# Altium PCB regulation.PcbDoc
Units mm, origin at the board's own origin, x right, y up, seen from the top; angles counter-clockwise.
Board outline 71.88 x 54.23 mm, 2 copper layers (Top Layer, Bottom Layer); 11 components, 9 nets, 31 pads, 17 vias.
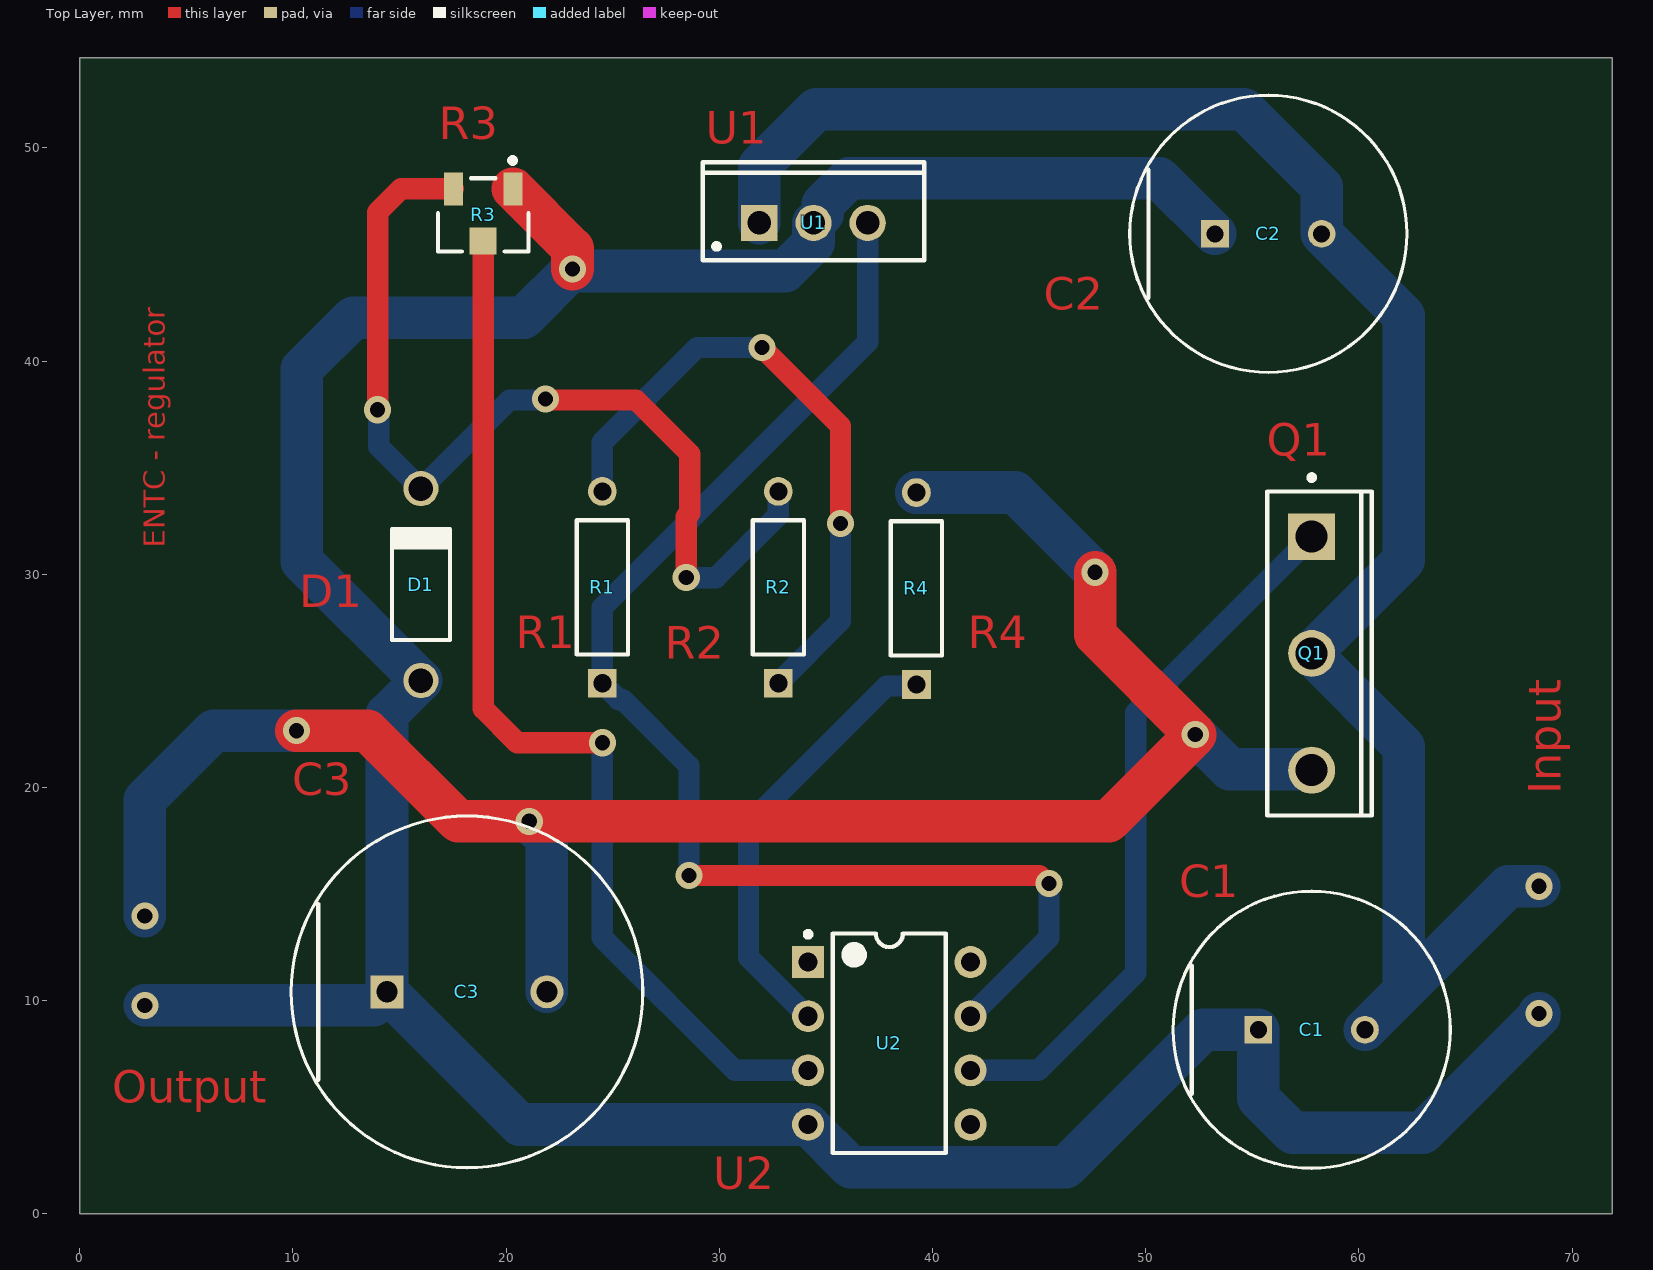
[diagram p0: Top Layer view]
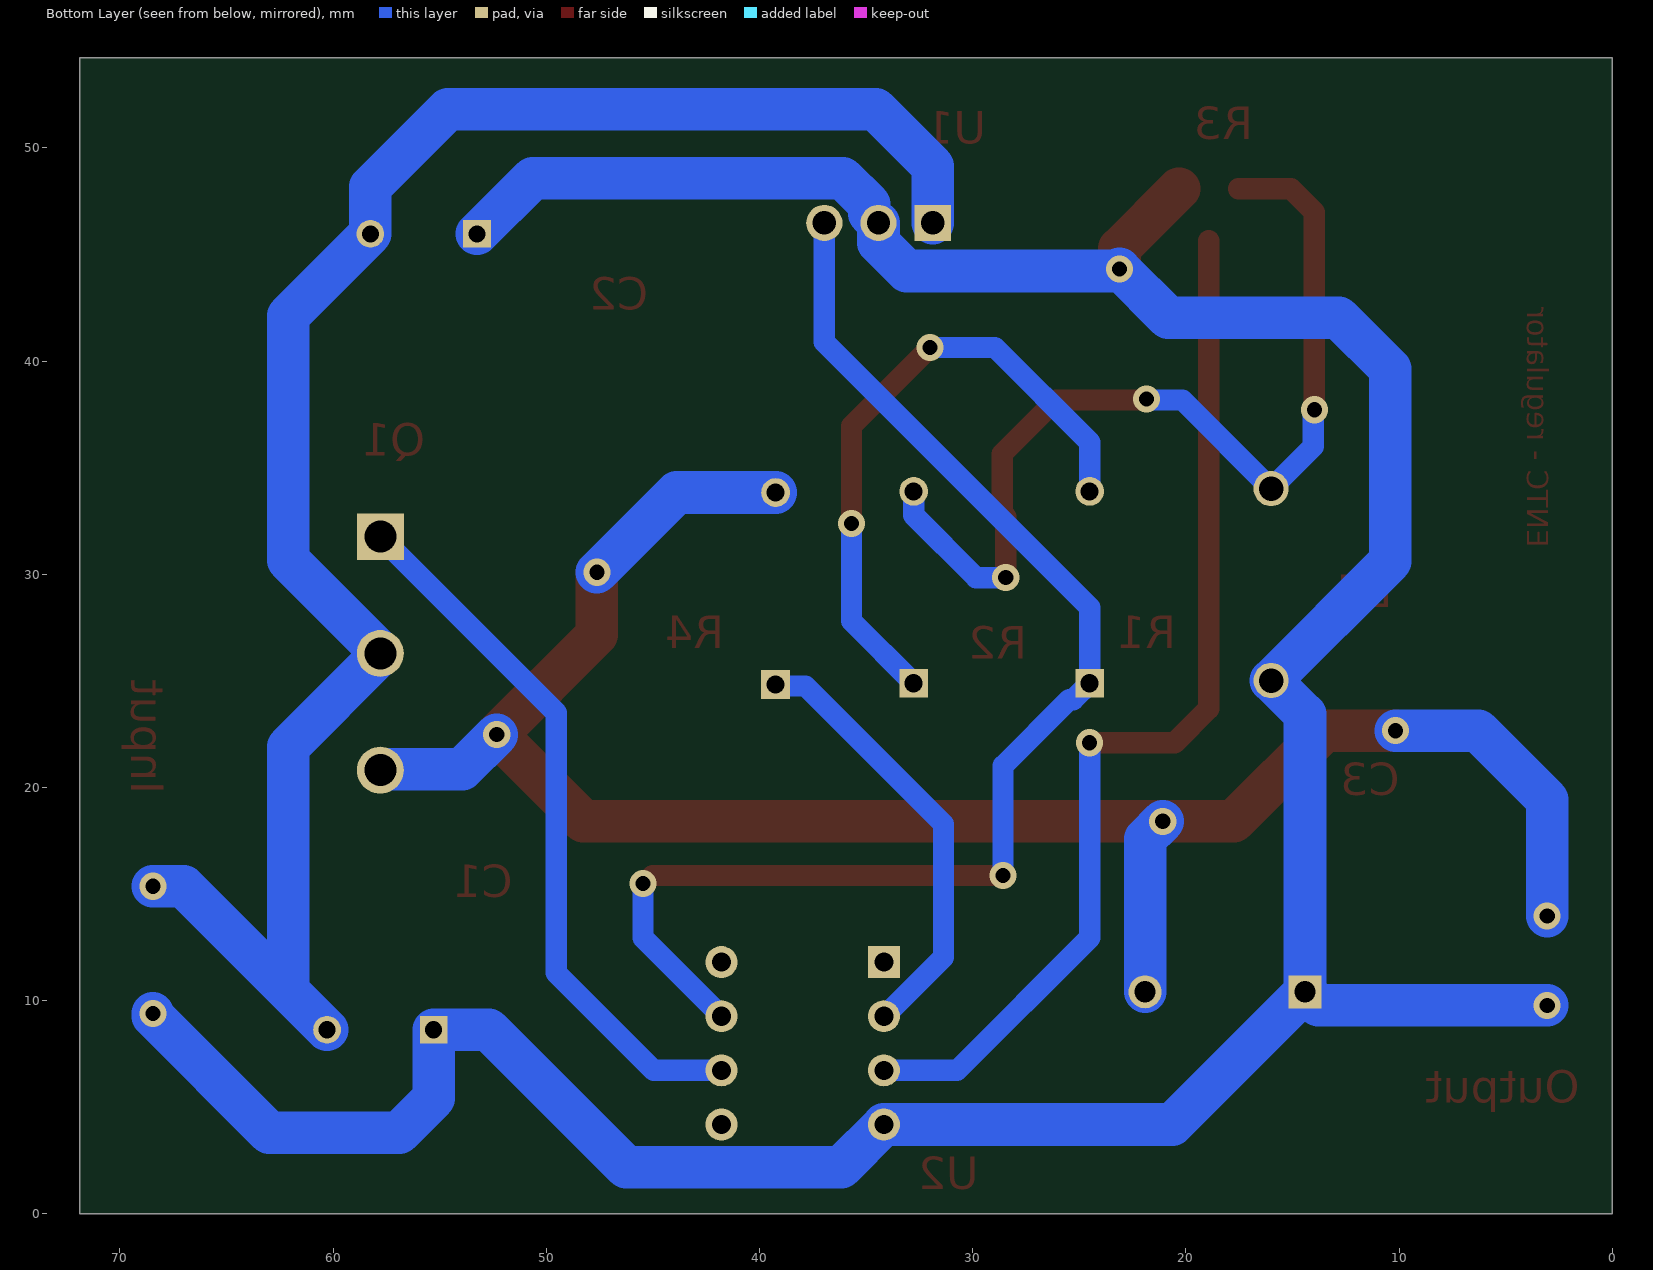
[diagram p1: Bottom Layer view, seen from below]

## Layer stack, top to bottom
Top Solder: solder mask 0.0102, Solder Resist, Dk 3.5
Top Layer: signal copper 0.0356
Dielectric 1: dielectric 0.32, FR-4, Dk 4.8
Bottom Layer: signal copper 0.0356
Bottom Solder: solder mask 0.0102, Solder Resist, Dk 3.5

## Board outline
0,0 71.882,0 71.882,54.229 0,54.229

## Design rules (kind name [scope] priority, off if disabled: settings)
Clearance [All] p1: gap=0.254 ignorepadtopadclearanceinfootprint=FALSE except(0: Arc-Hole Track-Hole SMDPad-Hole THPad-Hole Via-Hole Fill-Hole Poly-Hole Region-Hole Text-Hole)
PolygonConnect [All] p1: connectstyle=Relief reliefconductorwidth=0.254 reliefentries=4 polygonreliefangle="90 Angle" airgapwidth=0.254
RoutingVias [All] p1: holewidth=0.711 width=1.27 viastyle="Through Hole" minholewidth=0.711 minwidth=1.27 maxholewidth=0.711 maxwidth=1.27
SolderMaskExpansion [All] p1: expansion=0.102 istentingtop=FALSE
Width NetR1_1 [InNet('NetR1_1')] p1: maxlimit=2 minlimit=1 preferedwidth=1 minimp=50.000000 maximp=50.000000 favimp=50.000000
Width NetC3_2 [InNet('NetC3_2')] p2: maxlimit=10 minlimit=1 preferedwidth=2 minimp=50.000000 maximp=50.000000 favimp=50.000000
Width NetQ1_1 [InNet('NetQ1_1')] p3: maxlimit=2 minlimit=1 preferedwidth=1 minimp=50.000000 maximp=50.000000 favimp=50.000000
Width NetR4_1 [InNet('NetR4_1')] p4: maxlimit=2 minlimit=1 preferedwidth=1 minimp=50.000000 maximp=50.000000 favimp=50.000000
Width NetR3_2 [InNet('NetR3_2')] p5: maxlimit=2 minlimit=1 preferedwidth=1 minimp=50.000000 maximp=50.000000 favimp=50.000000
Width NetD1_2 [InNet('NetD1_2')] p6: maxlimit=2 minlimit=1 preferedwidth=1 minimp=50.000000 maximp=50.000000 favimp=50.000000
Width NetR1_2 [InNet('NetR1_2')] p7: maxlimit=2 minlimit=1 preferedwidth=1 minimp=50.000000 maximp=50.000000 favimp=50.000000
Width GND [InNet('GND')] p8: maxlimit=10 minlimit=2 preferedwidth=2 minimp=50.000000 maximp=50.000000 favimp=50.000000
Width vcc [InNet('VCC')] p9: maxlimit=10 minlimit=2 preferedwidth=2 minimp=50.000000 maximp=50.000000 favimp=50.000000
30 further rules are at their usual default settings.

## Components (designator, comment, footprint, x,y, rotation, side; value= is the part's Value field where it differs from the comment)
C1 "10mF" FP-RAD-TH-D_12_5_0_5-L_20-MFG 57.785,8.636 r0 top
C2 "10mF" FP-RAD-TH-D_12_5_0_5-L_20-MFG 55.753,45.974 r0 top
C3 "470u" FP-RAD-TH-D_16_0_5-L_15_1-MFG 18.161,10.414 r0 top
D1 "1N4742A" FAIR-DO-41-2_V 16.002,29.519 r90 top
Q1 "TIP142" ONSC-SOT-93_TO-218-3-340D-02 57.785,26.289 r0 top
R1 "500" RESA60-630X240 24.511,29.392 r90 top
R2 "150" RESA60-630X240 32.766,29.392 r90 top
R3 "10K" FP-3223W-1-104-MFG 18.923,46.863 r270 top
R4 "10K" RESA60-630X240 39.243,29.337 r90 top
U1 "L7815ABV" TO220 34.417,46.482 r0 top
U2 "LM741CN" N08E 37.973,8.001 r0 top

## Footprints (in the part's own frame and the unit in brackets; to place one, negate y for a bottom-side part, rotate by r counter-clockwise, add the part's x,y. Pads: shape width x height; smd on the part's side, far side on the other; paste and mask are expansions set on the pad)
FAIR-DO-41-2_V [mm] "2-Leads, Axial leaded, Body 2.72x5.2mm, Pin Spacing 9mm"
  round 1.65 hole 1.15: 1(-4.5,0) 2(4.5,0)
  silkscreen extent -2.6,-1.36 2.6,1.36, body extent -4.93,-1.36 4.93,1.36, height 2.71
FP-3223W-1-104-MFG [mm]
  rect 1.55x0.89 smd paste+0 mask+0: 1(-1.22,1.395) 3(-1.22,-1.395)
  rect 1.27x1.27 smd paste+0 mask+0: 2(1.22,0)
  silkscreen extent -2.67,-2.12 1.72,2.12, body extent -2.09,-2.22 1.95,2.22, height 0.25
FP-RAD-TH-D_12_5_0_5-L_20-MFG [mm]
  rect 1.3x1.3 hole 0.8 paste-1000 mask+0: 1(-2.5,0)
  round 1.3 hole 0.8 paste-1000 mask+0: 2(2.5,0)
  silkscreen extent -6.5,-6.5 6.5,6.5, body extent -6.6,-6.6 6.6,6.6, height 0.25
FP-RAD-TH-D_16_0_5-L_15_1-MFG [mm]
  rect 1.55x1.55 hole 1 paste-1000 mask+0: 1(-3.75,0)
  round 1.55 hole 1 paste-1000 mask+0: 2(3.75,0)
  silkscreen extent -8.25,-8.25 8.25,8.25, body extent -8.35,-8.35 8.35,8.35, height 0.25
N08E [mm] "DIP, 8-Pin, Row Spacing 7.62 mm, Pitch 2.54 mm"
  rect 1.5x1.5 hole 0.9: 1(-3.81,3.81)
  round 1.5 hole 0.9: 2(-3.81,1.27) 3(-3.81,-1.27) 4(-3.81,-3.81) 5(3.81,-3.81) 6(3.81,-1.27) 7(3.81,1.27) 8(3.81,3.81)
  silkscreen extent -3.93,-5.15 2.65,5.23, body extent -3.6,-5.15 3.6,5.15, height 5.33
ONSC-SOT-93_TO-218-3-340D-02 [mm] "FM, 3-Leads, Body 15.2x4.9mm, Pitch 5.475mm"
  rect 2.2x2.2 hole 1.5: 1(0,5.475)
  round 2.2 hole 1.5: 2(0,0) 3(0,-5.475)
  silkscreen extent -2.08,-7.6 2.82,8.37, body extent -2.08,-7.6 2.82,7.6, height 22.35
RESA60-630X240 [mm] "Axial Resistor, 2-Leads, Dia 2.4mm, Body Length 6.3mm"
  rect 1.35x1.35 hole 0.85: 1(-4.5,0)
  round 1.35 hole 0.85: 2(4.5,0)
  silkscreen extent -3.15,-1.2 3.15,1.2, body extent -3.15,-1.2 3.15,1.2, height 2.4
TO220 [mm] "TO, Thru-Hole, Vertical, Heatsink Mounted; 3 In-Line Leads; Pitch 2.54 mm"
  rect 1.7x1.7 hole 1.1: 1(-2.54,0)
  round 1.7 hole 1.1: 2(0,0) 3(2.54,0)
  silkscreen extent -5.2,-1.75 5.2,2.85, body extent -5.25,-1.8 5.25,2.9, height 19.7

## Part data
C1 C2: library part CMP-05427-001016-1, "Aluminum Electrolytic Capacitors (Radial Lead Type) 1000uF ±20% 25V", Capacitance=1mF, Case/Package=Radial, Leakage Current=250uA, Max Operating Temperature=105°C, Min Operating Temperature=-40°C, Package Quantity=200, Ripple Current=498mA, Tolerance=20%, Voltage=25V, Construction=RADIAL, Diameter=12.5mm, Dissipation Factor=0.22%, Height=20mm, Height - Seated (Max)=0.787inch, Lead Diameter=0.6mm, Lead Free="Lead Free", Lead Pitch=5mm, Lead/Base Style=Straight, Length=20mm, Life (Hours)=10000Hour, Mount="Through Hole", Number of Pins=2, Packaging=Bulk, Radiation Hardening=No, REACH SVHC="No SVHC", RoHS Compliant=Yes, Series=EB, Termination=Radial, Voltage Rating=25V, Voltage Rating (DC)=25V
C3: library part CMP-05427-000770-1, "Aluminum Electrolytic Capacitors (Radial Lead Type) AEC-Q200 Qualified 330uF ±20% 50V", Capacitance=330uF, Case/Package=Radial, Max Operating Temperature=125°C, Min Operating Temperature=-40°C, Package Quantity=100, Ripple Current=1.45A, Tolerance=20%, Voltage Rating=50V, Diameter=16mm, Height=15mm, Lead Diameter=0.8mm, Lead Pitch=7.5mm, Length=15mm, Life (Hours)=2000Hour, Mount="Through Hole", Number of Pins=2, Packaging=Bulk, Radiation Hardening=No, REACH SVHC="No SVHC", RoHS Compliant=Yes, Series=TA, Termination=Radial, Voltage Rating (DC)=50V
D1: library part CMP-0892-00001-1, "Zener Diode, 12V, 1W, 5%, -65 to 200 degC, 2-Pin DO-41, Body 2.72 x 5.2 mm, RoHS", Manufacturer="Fairchild Semiconductor", Operating and Storage Temperature Range="-65 to 200 degC", Test Current IZ (mA)=21, Tolerance=5%, ComponentLink1Description="Manufacturer URL", ComponentLink1URL=http://www.fairchildsemi.com/, ComponentLink2Description=Datasheet, ComponentLink2URL=http://www.fairchildsemi.com/ds/1N/1N4744A.pdf, ComponentLink3Description="Package Specification", ComponentLink3URL=http://www.fairchildsemi.com/dwg/DO/DO41A.pdf, DatasheetVersion="Rev. H3", IR (uA)=5, Mounting Technology="Through Hole", PackageDescription="2-Pin Axial leaded, Body 2.72 x 5.2 mm, Lead Spread 25.4 mm", PackageReference=DO-41-2, PackageVersion="Rev. 2", PartNumber=1N4742A, PD (W)=1, RoHS=TRUE, VZ (Max.) (V)=12.6, VZ (Min.) (V)=11.4, ZZ (Max) (ohm)=8
Q1: library part CMP-1047-00065-1, "Darlington Complementary Silicon Power Transistor, 3-Pin SOT-93, Tube", Manufacturer="On Semiconductor", ComponentLink1Description="Manufacturer URL", ComponentLink1URL=http://www.onsemi.com/, ComponentLink2Description=Datasheet, ComponentLink2URL=http://www.onsemi.cn/pub_link/Collateral/TIP140-D.PDF, ComponentLink3Description="Package Specification", ComponentLink3URL=http://www.onsemi.com/pub_link/Collateral/TIP33C-D.PDF, DatasheetVersion="Rev. 6", IC Continuous (A)=10, Mounting Technology="Through Hole", PackageDescription="3-Pin Flange Mount, Vertical Straight Lead, Body 14.95 x 4.8 mm, Pitch 5.475 mm", PackageReference=SOT-93_TO-218-3-340D-02, PackageVersion="Rev. E", Packing=Tube, PartNumber=TIP142, Polarity=NPN, RoHS=FALSE
R1 R2: library part CMP-1659-00075-1, "Axial Resistor, 1 KOhm, +/- 1%, 250 mW, -55 to 155 degC, 2-Pin THD, RoHS, Bulk", Case\Package=Axial, Max Operating Temperature="155 degC", Min Operating Temperature="-55 degC", Package Quantity=200, Power Rating="250 mW", Resistance="10 kohm", Tolerance=1%, Voltage Rating="250 V", ComponentLink1Description="Manufacturer URL", ComponentLink1URL=http://www.yageo.com/, ComponentLink2Description=Datasheet, ComponentLink2URL=http://www.yageo.com/documents/recent/Yageo%20LR_MFR_2013.pdf, DatasheetVersion=Apr-13, Length="0.248 inch", PackageDescription="2-Pin Axial Lead, Dia 2.4 mm, Body Length 6.3 mm", PackageReference=MFR-25, Packaging=Bulk, RoHSCompliant=true
R3: library part CMP-07234-000044-1, "TRIMMER 100K OHM 0.125W J LEAD", Max Operating Temperature=150°C, Max Power Dissipation=125mW, Max Supply Voltage=300V, Min Operating Temperature=-65°C, Package Quantity=200, Resistance=100kR, Resistor Type=Cermet, Temperature Coefficient=100ppm/°C, Tolerance=20%, Height=0.164inch, Mount="Surface Mount", Number of Turns=11, Packaging=Rail/Tube, Power Rating=125mW, Series="Trimpot® 3223 - Sealed", Taper=Linear, Technology=CERMET, Termination=SMD/SMT
R4: library part CMP-1659-00074-2, "Axial Resistor, 10 KOhm, +/- 1%, 0.25 W, -55 to 155 degC, 2-Pin THD, RoHS, Bulk", Case\/Package=Axial, Manufacturer=Yageo, Max Operating Temperature=155degC, Max Power Dissipation=250mW, Min Operating Temperature=-55degC, Package Description="2-Pin Axial Lead, Dia 2.4 mm, Body Length 6.3 mm", Package Quantity=200, Package Reference=MFR-25, Resistance=10KOhm, Temperature Coefficient=100ppm\/degreesC, Tolerance=1%, Voltage Rating=250V, Voltage Rating (DC)=200V, Composition=MetalFilm, Datasheet URL=http://www.yageo.com/documents/recent/Yageo%20LR_MFR_2013.pdf, Datasheet Version=04/2013, Lead Free=LeadFree, Length=0.248inch, Manufacturer URL=http://www.yageo.com/, Military Standard=Not, Mount=ThroughHole, Mounting Technology=ThroughHole, Number of Terminations=2, Packaging=Bulk, Power Rating=250mW, RoHSCompliant=True, Termination=Axial
U1: library part CMP-0244-00468-1, "Positive Voltage Regulator, 15V, 3-Pin TO-220", ComponentLink1Description="Manufacturer URL", ComponentLink1URL=http://www.st.com, ComponentLink2Description=Datasheet, ComponentLink2URL=http://www.st.com/internet/com/TECHNICAL_RESOURCES/TECHNICAL_LITERATURE/DATASHEET/CD00000444.pdf, ComponentLink3Description="Package Specification", ComponentLink3URL=http://www.st.com/internet/com/TECHNICAL_RESOURCES/TECHNICAL_LITERATURE/PACKAGE_INFORMATION/CD00004649.pdf, DatasheetVersion=16/11/2011, PackageDescription="TO, Thru-Hole, Vertical, Heatsink Mounted; 3 In-Line Leads; Pitch 2.54 mm", PackageReference=TO220, PackageVersion=ver3.0
U2: library part CMP-0055-00155-2, "Operational Amplifier, 8-pin MDIP", Manufacturer="National Semiconductor", PackageTopMarking=NSUZXYTTE#*LM*741CN, PowerWise=N, Code_JEDEC=MS-001-BA, ComponentLink1Description="LM741 Datasheet", ComponentLink1URL=http://www.national.com/ds/LM/LM741.pdf, ComponentLink2Description="LM741 Web Page", ComponentLink2URL=http://www.national.com/pf/LM/LM741.html, ComponentLink3Description="N08E Package Page", ComponentLink3URL=http://www.national.com/packaging/folders/n08e.html, CompType=Amplifiers, DatasheetVersion=Aug-2000, PackageDescription="MDIP, .365 x .250 x .130in, 8 Lead, .100in Pitch", PackageReference=N08E, PackageVersion="revG, May-2006", PinCount=8, RevisionNote="Component URLs added", RoHS=N

## Via types
v1: diameter 1.27, hole 0.711, Top Layer to Bottom Layer, 17 vias

## Nets (pads, with @x,y where several pads share a name; then routed paths per layer and width w, separated by ;. In a path a pad name is that pad's centre, name@x,y a point inside that pad or via, vN(x,y) a via of type N, cw(c..) or ccw(c..) an arc to the next point about the centre after c; other vN are vias at no path point)
GND: C1.1 C2.1 C3.1 D1.1 R3.1 U1.2 U2.4 | length 163.6
  Top Layer w2: R3.1 23.114,45.287 v1(23.114,44.323)
  Bottom Layer w2: v1(3.048,9.779) 13.776,9.779 C3.1 ; C2.1 50.641,48.586 36.085,48.586 34.853,47.354 34.853,46.918 U1.2 34.417,45.549 33.096,44.228 23.209,44.228 v1(23.114,44.323) 20.828,42.037 12.823,42.037 10.414,39.628 10.414,30.607 D1.1 14.411,23.428 C3.1 ; v1(68.453,9.398) 68.453,9.271 62.992,3.81 56.896,3.81 55.285,5.421 C1.1 52.705,8.636 46.256,2.187 36.167,2.187 U2.4 20.634,4.191 C3.1
NetC3_2: C3.2 Q1.3 R4.2 | length 93.5
  Top Layer w2: v1(10.16,22.666) 13.496,22.666 17.746,18.415 v1(21.082,18.415) 48.26,18.415 v1(52.324,22.479) 47.625,27.178 v1(47.625,30.099)
  Bottom Layer w2: v1(3.048,13.97) 3.048,19.431 6.283,22.666 v1(10.16,22.666) ; v1(21.082,18.415) 21.911,17.586 C3.2 ; R4.2 43.887,33.837 v1(47.625,30.099) ; v1(52.324,22.479) 53.951,20.852 57.747,20.852 Q1.3
NetD1_2: D1.2 R2.2 R3.3 | length 45.8
  Top Layer w1: v1(13.97,37.719) 13.97,46.989 15.064,48.083 R3.3 ; v1(21.844,38.227) 21.896,38.175 26.087,38.175 28.617,35.645 28.617,32.866 28.448,32.697 v1(28.448,29.845)
  Bottom Layer w1: v1(13.97,37.719) 14.022,37.667 14.022,35.999 D1.2 20.158,38.175 21.792,38.175 v1(21.844,38.227) ; v1(28.448,29.845) 29.845,29.845 32.766,32.766 R2.2
NetQ1_1: Q1.1 U2.6 | length 33.5
  Bottom Layer w1: U2.6 44.958,6.731 49.532,11.305 49.532,23.511 Q1.1
NetR1_1: R1.1 U1.3 U2.7 | length 62.4
  Top Layer w1: v1(28.575,15.875) 45.012,15.875 45.393,15.494 v1(45.466,15.494)
  Bottom Layer w1: v1(28.575,15.875) 28.575,21.014 25.467,24.122 25.281,24.122 R1.1 24.511,28.448 36.957,40.894 U1.3 ; U2.7 45.466,12.954 v1(45.466,15.494)
NetR1_2: R1.2 R2.1 | length 30.1
  Top Layer w1: v1(32.004,40.64) 35.687,36.957 v1(35.687,32.385)
  Bottom Layer w1: R1.2 24.511,36.195 28.956,40.64 v1(32.004,40.64) ; R2.1 35.687,27.813 v1(35.687,32.385)
NetR3_2: R3.2 U2.3 | length 49.6
  Top Layer w1: R3.2 18.923,23.7 20.525,22.098 v1(24.511,22.098)
  Bottom Layer w1: v1(24.511,22.098) 24.511,12.954 30.734,6.731 U2.3
NetR4_1: R4.1 U2.2 | length 20.8
  Bottom Layer w1: U2.2 34.137,9.271 31.369,12.039 31.369,18.288 37.845,24.764 39.17,24.764 R4.1
VCC: C1.2 C2.2 Q1.2 U1.1 | length 85.5
  Bottom Layer w2: U1.1 31.877,49.149 34.544,51.816 54.61,51.816 58.253,48.173 C2.2 62.103,42.124 62.103,30.661 57.785,26.343 Q1.2 57.785,26.235 62.103,21.917 62.103,10.454 ; C1.2 62.103,10.454 ; v1(68.453,15.367) 67.016,15.367 62.103,10.454
pads on no net: U2.1 U2.5 U2.8

## Other copper
Top Layer:
  text "ENTC - regulator" at 3.985,31.242 h1 r90
  text "Input" at 69.469,19.685 h1.52 r90
  text "Output" at 1.524,5.207 h1.52